# Altium PCB iCEstick_extension.PcbDoc
Units mm, origin at the board's own origin, x right, y up, seen from the top; angles counter-clockwise.
Board outline 37 x 15.2 mm, 2 copper layers (Top Layer, Bottom Layer), stack 1.071 mm thick; 16 components, 12 nets, 53 pads, 53 vias.
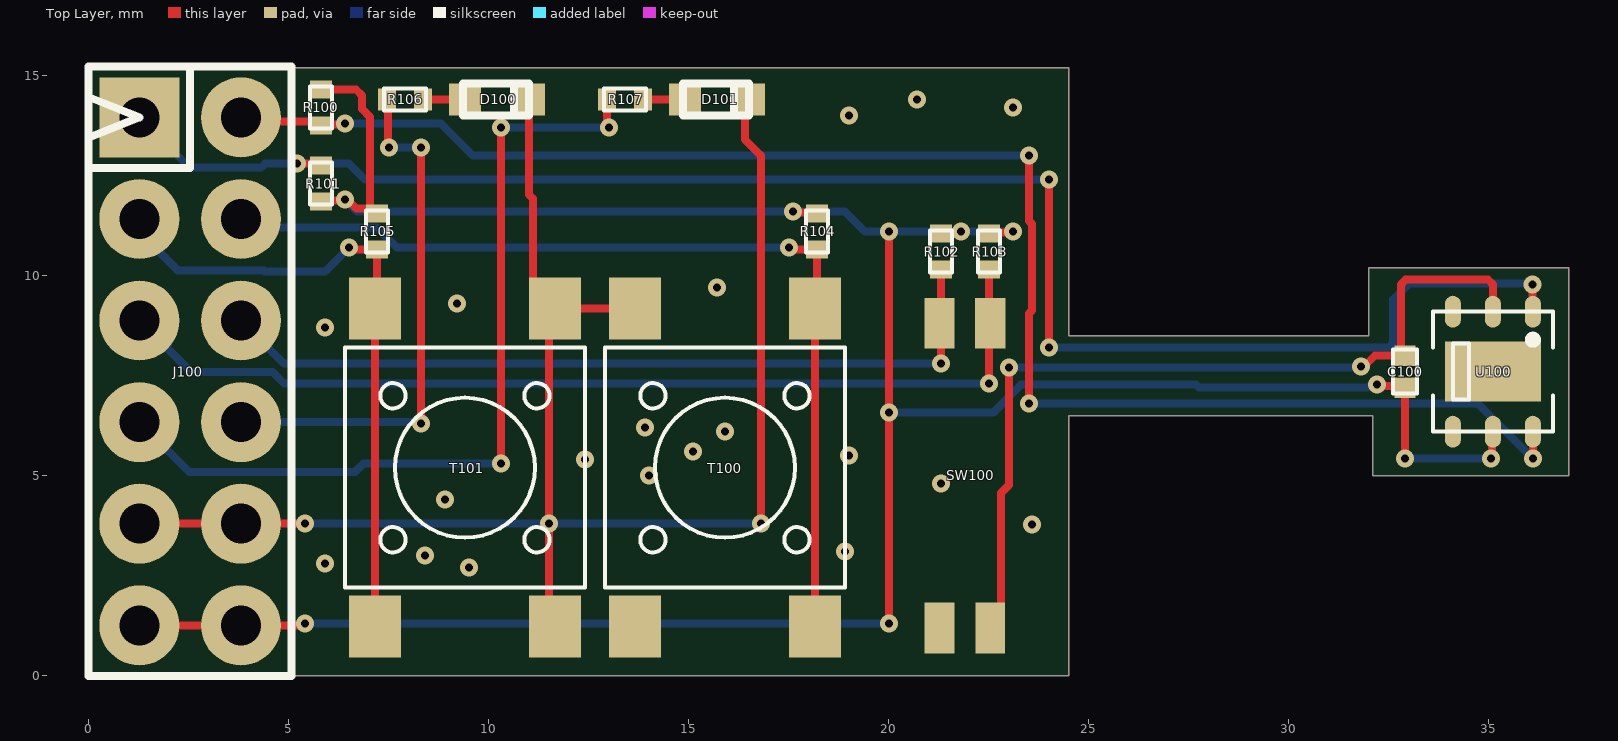
[diagram p0: Top Layer view]
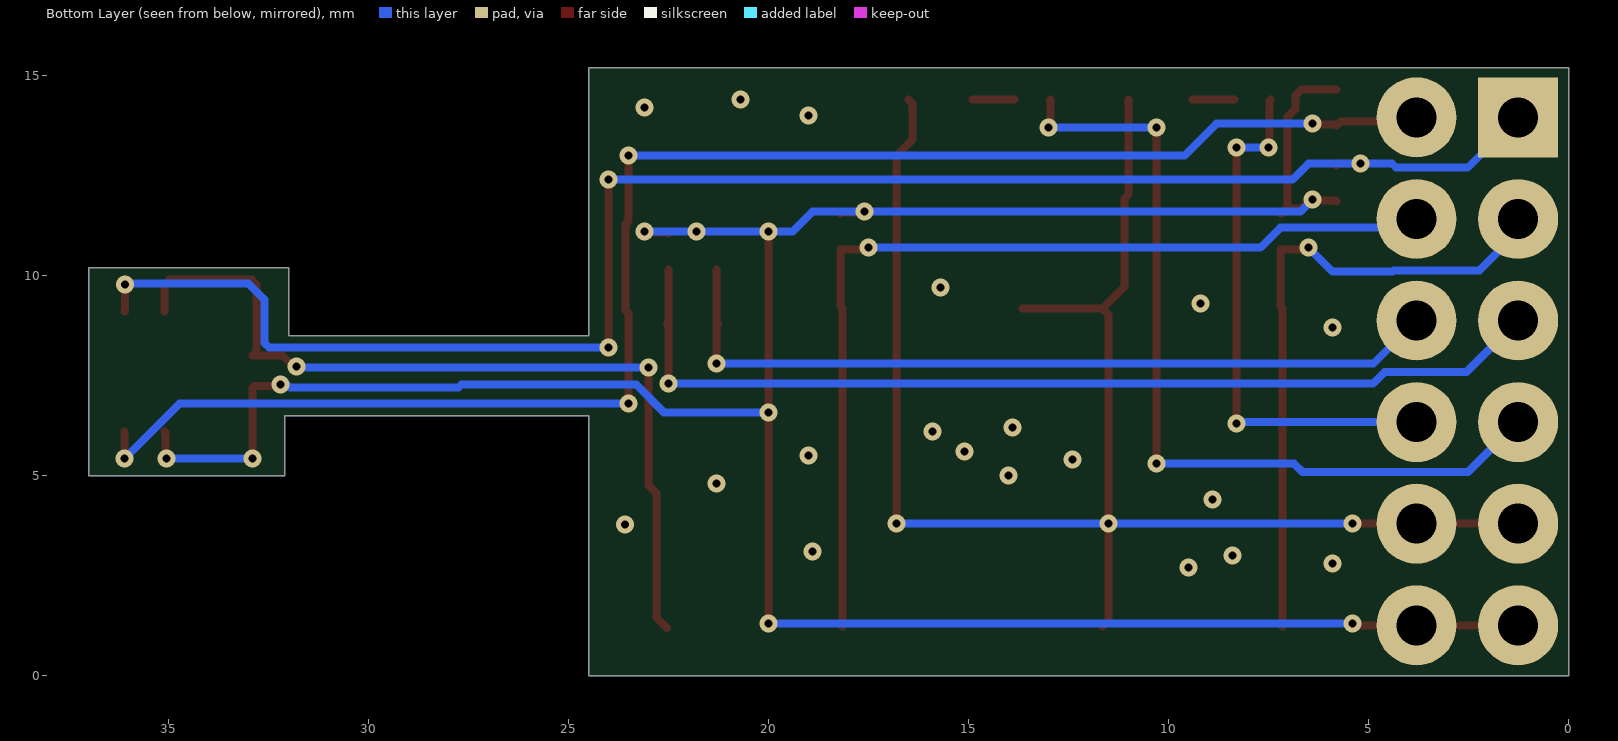
[diagram p1: Bottom Layer view, seen from below]

## Layer stack, top to bottom
Top Solder: solder mask 0.0102, Solder Resist, Dk 3.5
Top Layer: signal copper 0.0356
Dielectric1: core 1, FR-4, Dk 4.8
Bottom Layer: signal copper 0.0356
Bottom Solder: solder mask 0.0102, Solder Resist, Dk 3.5

## Board outline
0,0 0,15.2 24.5,15.2 24.5,8.5 32,8.5 32,10.2 37,10.2 37,5 32.1,5 32.1,6.5 24.5,6.5 24.5,0

## Design rules (kind name [scope] priority, off if disabled: settings)
AssemblyTestPointUsage [All] p0 off: scope1count=1 scope1_0_kind=Board scope1_0_value=Board scope2count=1 scope2_0_kind=Board scope2_0_value=Board commentlength=0
AssemblyTestPointUsage [All] p1 off:
AssemblyTestpoint [All] p0 off: scope1count=1 scope1_0_kind=Board scope1_0_value=Board scope2count=1 scope2_0_kind=Board scope2_0_value=Board commentlength=0
AssemblyTestpoint [All] p1 off: testpointundercomponent=TRUE minsize=1.016 maxsize=2.54 preferedsize=1.524 minholesize=0 maxholesize=1.016 preferedholesize=0.813 testpointgrid=0.025 usegrid=TRUE gridtolerance=0 allowsidetop=TRUE allowsidebottom=TRUE
BoardOutlineClearance [All] p0 off: scope1count=1 scope1_0_kind=Board scope1_0_value=Board scope2count=1 scope2_0_kind=Board scope2_0_value=Board commentlength=83 gap=0.2 // Protel DXP Scope 1 Expression Was: Not OnLayer('Top Overlay', 'Bottom Overlay')
BoardOutlineClearance [Not OnLayer('Top Overlay', 'Bottom Overlay')] p1: gap=0.2 ignorepadtopadclearanceinfootprint=FALSE
Clearance [All] p0: scope1count=1 scope1_0_kind=Board scope1_0_value=Board scope2count=1 scope2_0_kind=Board scope2_0_value=Board commentlength=0 gap=0.15
Clearance Clearance_Polygon [All] p0 off: scope1count=1 scope1_0_kind=Board scope1_0_value=Board scope2count=1 scope2_0_kind=Board scope2_0_value=Board commentlength=82 gap=0.254 // Protel DXP Scope 2 Expression Was: not (istrack and OnLayer('Keep-Out Layer'))
Clearance Clearance_Polygon [InNamedPolygon('Top-GND') vs not (istrack and OnLayer('Keep-Out Layer'))] p1: gap=0.254 ignorepadtopadclearanceinfootprint=FALSE except(0: Arc-Hole Track-Hole SMDPad-Hole THPad-Hole Via-Hole Fill-Hole Poly-Hole Region-Hole Text-Hole)
Clearance [All] p2: gap=0.15 ignorepadtopadclearanceinfootprint=FALSE except(0: Arc-Hole Track-Hole SMDPad-Hole THPad-Hole Via-Hole Fill-Hole Poly-Hole Region-Hole Text-Hole)
ComponentClearance [All] p0 off: scope1count=1 scope1_0_kind=Board scope1_0_value=Board scope2count=1 scope2_0_kind=Board scope2_0_value=Board commentlength=0 gap=0.254 collisioncheckmode=3
ComponentClearance [All] p1 off: gap=0.254 collisioncheckmode=3 verticalgap=0.254 showdistances=FALSE
DiffPairsRouting [All] p0: scope1count=1 scope1_0_kind=Board scope1_0_value=Board scope2count=1 scope2_0_kind=Board scope2_0_value=Board commentlength=0
FabricationTestPointUsage [All] p0 off: scope1count=1 scope1_0_kind=Board scope1_0_value=Board scope2count=1 scope2_0_kind=Board scope2_0_value=Board commentlength=0 valid=0 allowmultiple=FALSE
FabricationTestPointUsage [All] p1 off: valid=0 allowmultiple=FALSE
FabricationTestpoint [All] p0 off: scope1count=1 scope1_0_kind=Board scope1_0_value=Board scope2count=1 scope2_0_kind=Board scope2_0_value=Board commentlength=0 side=3 testpointundercomponent=TRUE minsize=1.016 maxsize=2.54 preferedsize=1.524 minholesize=0 maxholesize=1.016 preferedholesize=0.813 testpointgrid=0.025
FabricationTestpoint [All] p1 off: side=3 testpointundercomponent=TRUE minsize=1.016 maxsize=2.54 preferedsize=1.524 minholesize=0 maxholesize=1.016 preferedholesize=0.813 testpointgrid=0.025 allowsidetop=TRUE allowsidebottom=TRUE usegrid=TRUE gridtolerance=0
FanoutControl Fanout_BGA [All] p0 off: scope1count=1 scope1_0_kind=Board scope1_0_value=Board scope2count=1 scope2_0_kind=Board scope2_0_value=Board commentlength=69 // Protel DXP Scope 1 Expression Was: IsBGA   Fanout_BGA (Default Rule)
FanoutControl Fanout_LCC [All] p0 off: scope1count=1 scope1_0_kind=Board scope1_0_value=Board scope2count=1 scope2_0_kind=Board scope2_0_value=Board commentlength=69 // Protel DXP Scope 1 Expression Was: IsLCC   Fanout_LCC (Default Rule)
FanoutControl Fanout_SOIC [All] p0 off: scope1count=1 scope1_0_kind=Board scope1_0_value=Board scope2count=1 scope2_0_kind=Board scope2_0_value=Board commentlength=71 // Protel DXP Scope 1 Expression Was: IsSOIC   Fanout_SOIC (Default Rule)
FanoutControl Fanout_Small [All] p0 off: scope1count=1 scope1_0_kind=Board scope1_0_value=Board scope2count=1 scope2_0_kind=Board scope2_0_value=Board commentlength=84 // Protel DXP Scope 1 Expression Was: (CompPinCount < 5)   Fanout_Small (Default Rule)
FanoutControl Fanout_Default [All] p0: scope1count=1 scope1_0_kind=Board scope1_0_value=Board scope2count=1 scope2_0_kind=Board scope2_0_value=Board commentlength=30 // Fanout_Default (Default Rule)
Height [All] p0: scope1count=1 scope1_0_kind=Board scope1_0_value=Board scope2count=1 scope2_0_kind=Board scope2_0_value=Board commentlength=0
HoleSize [All] p0: scope1count=1 scope1_0_kind=Board scope1_0_value=Board scope2count=1 scope2_0_kind=Board scope2_0_value=Board commentlength=0 absolutevalues=TRUE maxlimit=5 minlimit=0.2 maxpercent=80.000 minpercent=20.000
HoleSize [All] p1: absolutevalues=TRUE maxlimit=5 minlimit=0.2 maxpercent=80.000 minpercent=20.000
HoleToHoleClearance HoleToHoleClearance_Seperator [All] p0: scope1count=1 scope1_0_kind=Board scope1_0_value=Board scope2count=1 scope2_0_kind=Board scope2_0_value=Board commentlength=0
HoleToHoleClearance [All] p0: scope1count=1 scope1_0_kind=Board scope1_0_value=Board scope2count=1 scope2_0_kind=Board scope2_0_value=Board commentlength=0
HoleToHoleClearance HoleToHoleClearance_Seperator [All] p1: gap=0.1 allowstackedmicrovias=TRUE
HoleToHoleClearance [All] p2: gap=0.2 allowstackedmicrovias=TRUE
LayerPairs [All] p0: scope1count=1 scope1_0_kind=Board scope1_0_value=Board scope2count=1 scope2_0_kind=Board scope2_0_value=Board commentlength=0 enforce=TRUE
MinimumSolderMaskSliver [All] p0 off: scope1count=1 scope1_0_kind=Board scope1_0_value=Board scope2count=1 scope2_0_kind=Board scope2_0_value=Board commentlength=0
MinimumSolderMaskSliver [All] p1 off: minsoldermaskwidth=0.1
NetAntennae [All] p0: scope1count=1 scope1_0_kind=Board scope1_0_value=Board scope2count=1 scope2_0_kind=Board scope2_0_value=Board commentlength=0
PasteMaskExpansion [All] p0: scope1count=1 scope1_0_kind=Board scope1_0_value=Board scope2count=1 scope2_0_kind=Board scope2_0_value=Board commentlength=0 expansion=0
PlaneClearance [All] p0: scope1count=1 scope1_0_kind=Board scope1_0_value=Board scope2count=1 scope2_0_kind=Board scope2_0_value=Board commentlength=0 clearance=0.508
PlaneConnect [All] p0: scope1count=1 scope1_0_kind=Board scope1_0_value=Board scope2count=1 scope2_0_kind=Board scope2_0_value=Board commentlength=0 planeconnectstyle=Relief reliefexpansion=0.508 reliefentries=4 reliefconductorwidth=0.254 reliefairgap=0.254
PolygonConnect [All] p0: scope1count=1 scope1_0_kind=Board scope1_0_value=Board scope2count=1 scope2_0_kind=Board scope2_0_value=Board commentlength=0 connectstyle=Relief reliefconductorwidth=0.254 reliefentries=4 polygonreliefangle="90 Angle"
PolygonConnect Polygon_Via [All] p0 off: scope1count=1 scope1_0_kind=Board scope1_0_value=Board scope2count=1 scope2_0_kind=Board scope2_0_value=Board commentlength=44 connectstyle=Direct reliefconductorwidth=0.254 reliefentries=4 polygonreliefangle="90 Angle" // Protel DXP Scope 1 Expression Was: isvia
PolygonConnect Polygon_Via [isvia] p1: connectstyle=Direct reliefconductorwidth=0.254 reliefentries=4 polygonreliefangle="90 Angle" airgapwidth=0.254
PolygonConnect [All] p2: connectstyle=Relief reliefconductorwidth=0.254 reliefentries=4 polygonreliefangle="90 Angle" airgapwidth=0.254
RoutingCorners [All] p0: scope1count=1 scope1_0_kind=Board scope1_0_value=Board scope2count=1 scope2_0_kind=Board scope2_0_value=Board commentlength=0 cornerstyle=45-Degree minsetback=2.54 maxsetback=2.54
RoutingLayers [All] p0: scope1count=1 scope1_0_kind=Board scope1_0_value=Board scope2count=1 scope2_0_kind=Board scope2_0_value=Board commentlength=0 top layer=Automatic bottom layer=Automatic
RoutingPriority [All] p0: scope1count=1 scope1_0_kind=Board scope1_0_value=Board scope2count=1 scope2_0_kind=Board scope2_0_value=Board commentlength=0
RoutingTopology [All] p0: scope1count=1 scope1_0_kind=Board scope1_0_value=Board scope2count=1 scope2_0_kind=Board scope2_0_value=Board commentlength=0 topology=Shortest
RoutingVias [All] p0: scope1count=1 scope1_0_kind=Board scope1_0_value=Board scope2count=1 scope2_0_kind=Board scope2_0_value=Board commentlength=0 holewidth=0.2 width=0.45 viastyle="Through Hole" minholewidth=0.2 minwidth=0.45 maxholewidth=0.2 maxwidth=0.45
RoutingVias [All] p1: holewidth=0.2 width=0.45 viastyle="Through Hole" minholewidth=0.2 minwidth=0.45 maxholewidth=0.2 maxwidth=0.45
ShortCircuit [All] p0: scope1count=1 scope1_0_kind=Board scope1_0_value=Board scope2count=1 scope2_0_kind=Board scope2_0_value=Board commentlength=0 allowed=FALSE
SilkToBoardRegionClearance [All] p0: scope1count=1 scope1_0_kind=Board scope1_0_value=Board scope2count=1 scope2_0_kind=Board scope2_0_value=Board commentlength=0
SilkToSilkClearance [All] p0 off: scope1count=1 scope1_0_kind=Board scope1_0_value=Board scope2count=1 scope2_0_kind=Board scope2_0_value=Board commentlength=0
SilkToSilkClearance [All] p1 off: silktosilkclearance=0.254
SilkToSolderMaskClearance SilkscreenOverComponentPads [All] p0 off: scope1count=1 scope1_0_kind=Board scope1_0_value=Board scope2count=1 scope2_0_kind=Board scope2_0_value=Board commentlength=44 // Protel DXP Scope 1 Expression Was: IsPad
SilkToSolderMaskClearance SilkscreenOverComponentPads [IsPad] p1 off: minsilkscreentomaskgap=0.254 clearancetoexposedcopper=TRUE
SolderMaskExpansion [All] p0: scope1count=1 scope1_0_kind=Board scope1_0_value=Board scope2count=1 scope2_0_kind=Board scope2_0_value=Board commentlength=0 expansion=0.1
SolderMaskExpansion [All] p1: expansion=0.1 istentingtop=FALSE
UnRoutedNet [All] p0: scope1count=1 scope1_0_kind=Board scope1_0_value=Board scope2count=1 scope2_0_kind=Board scope2_0_value=Board commentlength=0
UnpouredPolygon [All] p0: scope1count=1 scope1_0_kind=Board scope1_0_value=Board scope2count=1 scope2_0_kind=Board scope2_0_value=Board commentlength=0
Width [All] p0: scope1count=1 scope1_0_kind=Board scope1_0_value=Board scope2count=1 scope2_0_kind=Board scope2_0_value=Board commentlength=0 maxlimit=5 minlimit=0.15 preferedwidth=0.2
Width [All] p1: maxlimit=5 minlimit=0.15 preferedwidth=0.2
20 further rules are at their usual default settings.

## Components (designator, comment, footprint, x,y, rotation, side; value= is the part's Value field where it differs from the comment)
C100 "" CAPC0402(1005)60_L 32.9,7.6 r90 top
D100 "150060VS75000" "0603 LED pcb" 10.2,14.4 r180 top
D101 "150060VS75000" "0603 LED pcb" 15.7,14.4 r180 top
J100 "HDR2x6" HDR2x6 2.53,11.42 r270 top
R100 "RMCF0402FT4K70" RESC0402(1005)_L 5.8,14.2 r270 top
R101 "RMCF0402FT4K70" RESC0402(1005)_L 5.8,12.3 r90 top
R102 "RMCF0402FT4K70" RESC0402(1005)_L 21.3,10.6 r270 top
R103 "RMCF0402FT4K70" RESC0402(1005)_L 22.5,10.6 r270 top
R104 "RMCF0402FT4K70" RESC0402(1005)_L 18.2,11.1 r270 top
R105 "RMCF0402FT4K70" RESC0402(1005)_L 7.2,11.1 r270 top
R106 "RC0402FR-07100RL" RESC0402(1005)_L 7.9,14.4 r0 top
R107 "RC0402FR-07100RL" RESC0402(1005)_L 13.4,14.4 r0 top
SW100 "SW DIP-2" SW_TDA02 21.9,5 r270 top
T100 "PTS645SK43SMTR92LFS" "PTS645SM43SMTR92 LFS - duplicate" 15.9,5.2 r270 top
T101 "PTS645SK43SMTR92LFS" "PTS645SM43SMTR92 LFS - duplicate" 9.4,5.2 r90 top
U100 "SHT21" SHT2x_DFN6 35.1,7.6 r270 top

## Footprints (in the part's own frame and the unit in brackets; to place one, negate y for a bottom-side part, rotate by r counter-clockwise, add the part's x,y. Pads: shape width x height; smd on the part's side, far side on the other; paste and mask are expansions set on the pad)
"0603 LED pcb" [mm] "0603 SMD LED Height max. 1mm"
  rect 0.8x0.8 smd: 1(-0.8,0) 2(0.8,0)
  silkscreen extent -0.8,-0.4 0.85,0.4
CAPC0402(1005)60_L [mm] "Chip Capacitor, Body 1.0x0.5mm, Height 0.6mm, IPC High Density"
  rect 0.52x0.52 smd: 1(-0.4,0) 2(0.4,0)
  silkscreen extent -0.55,-0.3 0.55,0.3
HDR2x6 [mm] "2x6 Pin Header, 2.54 mm"
  rect 2x2 hole 1: 1(-2.54,-1.27)
  round 2 hole 1: 2(-2.54,1.27) 3(0,-1.27) 4(0,1.27) 5(2.54,-1.27) 6(2.54,1.27) 7(5.08,-1.27) 8(5.08,1.27) 9(7.62,-1.27) 10(7.62,1.27) 11(10.16,-1.27) 12(10.16,1.27)
  silkscreen extent -3.81,-2.54 11.43,2.54
"PTS645SM43SMTR92 LFS - duplicate" [mm] "SWITCH TACTILE SPST-NO 0.05A 12V"
  rect 1.55x1.3 smd: 1(-3.975,2.25) 2(3.975,2.25) 3(-3.975,-2.25) 4(3.975,-2.25)
  silkscreen extent -3,-3 3,3
RESC0402(1005)_L [mm] "Chip Resistor, Body 1.0x0.5mm, IPC High Density"
  rect 0.45x0.55 smd: 1(-0.45,0) 2(0.45,0)
  silkscreen extent -0.53,-0.27 0.53,0.28
SHT2x_DFN6 [mm]
  oval 0.8x0.4 smd: 1(-1.5,1) 2(-1.5,0) 3(-1.5,-1) 4(1.5,-1) 5(1.5,0) 6(1.5,1)
  rect 1.5x2.4 smd: 7(0,0)
  silkscreen extent -1.5,-1.5 1.5,1.5
SW_TDA02 [mm]
  rect 1.27x0.76 smd: 1(-3.81,0.635) 2(-3.81,-0.635) 3(3.81,-0.635)
  rect 1.27x0.74 smd: 4(3.81,0.635)

## Part data
C100: library part CMP-00636-01, "0.1µF ±10% 100V Ceramic Capacitor X5R 0402 (1005 Metric)"
D100 D101: library part CMP-00024-A.5, "Green 570nm LED Indication - Discrete 2V 0603 (1608 Metric)"
J100: library part HDR2x6-02, "2x6 Pin Header, 2.54mm"
R100 R101 R102 R103 R104 R105: library part CMP-00490-01, "4.7 kOhms ±1% 0.063W, 1/16W Chip Resistor 0402 (1005 Metric) Automotive AEC-Q200 Thick Film"
R106 R107: library part CMP-00556-01, "100 Ohms ±1% 0.063W, 1/16W Chip Resistor 0402 (1005 Metric)  Thick Film"
SW100: library part CMP-001-0045-01, "SWITCH DIP 2POS HALF PITCH 24V"
T100 T101: library part CMP-00280-01, "SWITCH TACTILE SPST-NO 0.05A 12V"
U100: library part SHT21-01, "Hygrometer and Thermometer, I2C Bus"

## Via types
v1: diameter 0.45, hole 0.2, Top Layer to Bottom Layer, tented both sides, 53 vias

## Nets (pads, with @x,y where several pads share a name; then routed paths per layer and width w, separated by ;. In a path a pad name is that pad's centre, name@x,y a point inside that pad or via, vN(x,y) a via of type N, cw(c..) or ccw(c..) an arc to the next point about the centre after c; other vN are vias at no path point)
3V3: C100.1 J100.11 J100.12 R100.1 R101.1 R102.1 R103.1 R104.1 R105.1 U100.5 | length 70.5
  Top Layer w0.2: J100.11 J100.12 5.36,1.26 v1(5.4,1.3) ; R101.1 5.825,11.875 6.375,11.875 v1(6.4,11.9) 6.468,11.9 6.693,11.675 R105.1@7.025,11.675 ; R100.1 6.683,14.65 6.824,14.509 6.824,14.172 7.025,13.971 R105.1@7.025,11.675 ; v1(17.6,11.6) 17.625,11.575 18.175,11.575 R104.1 ; v1(20,1.3) 20,6.582 v1(20,11.1) ; R103.1 22.525,11.075 23.075,11.075 v1(23.1,11.1) ; v1(32.2,7.275) 32.237,7.237 32.863,7.237 32.903,7.197 32.903,5.428 v1(32.906,5.425) ; v1(35.05,5.425) 35.075,5.45 35.075,6.075 U100.5 ; R105.1@7.025,11.675 7.075,11.675 R105.1 7.15,11.55 R105.1@7.025,11.675
  Bottom Layer w0.2: v1(5.4,1.3) v1(20,1.3) ; v1(6.4,11.9) 6.7,11.6 v1(17.6,11.6) 18.9,11.6 19.4,11.1 v1(20,11.1) v1(21.8,11.1) v1(23.1,11.1) ; v1(20,6.582) 22.611,6.582 23.303,7.275 27.68,7.275 27.755,7.2 31.958,7.2 31.985,7.227 32.152,7.227 v1(32.2,7.275) ; v1(32.906,5.425) v1(35.05,5.425)
GND: C100.2 D100.1 D101.1 J100.9 J100.10 SW100.3 SW100.4 T100.3 T100.4 T101.3 T101.4 U100.2 | length 63.5
  Top Layer w0.2: J100.9 J100.10 v1(5.4,3.8) ; D100.1 11,12.025 11.1,11.925 11.1,9.725 T101.4 ; T101.3 11.5,1.375 v1(11.5,3.8) 11.5,9.025 T101.4 ; T100.3 T101.4 ; D101.1 16.4,14.3 16.4,13.4 16.8,13 v1(16.8,3.8) ; SW100.4 22.805,1.46 22.805,4.57 23,4.765 v1(23,7.7) ; v1(31.803,7.725) 31.871,7.725 32.146,8 C100.2 32.8,8.1 32.8,9.783 32.917,9.9 34.983,9.9 35.1,9.783 U100.2
  Bottom Layer w0.2: v1(5.4,3.8) v1(11.5,3.8) v1(16.8,3.8) ; v1(23,7.7) 31.778,7.7 v1(31.803,7.725)
  other v1: 9.5,2.7 5.9,2.8 8.4,3 18.9,3.1 23.582,3.782 8.9,4.4 21.3,4.8 14,5 12.4,5.4 19,5.5 15.1,5.6 15.9,6.1 13.9,6.2 5.9,8.7 9.2,9.3 15.7,9.7 19,14 23.1,14.2 20.7,14.4
NetD100_2: D100.2 R106.2 | length 1
  Top Layer w0.2: R106.2 D100.2
NetD101_2: D101.2 R107.2 | length 1
  Top Layer w0.2: R107.2 D101.2
PIO1_02: J100.1 R101.2 U100.1 | length 42.4
  Top Layer w0.2: v1(5.2,12.8) 5.75,12.8 R101.2 ; v1(24,8.2) v1(24,12.4) ; v1(36.088,9.775) 36.094,9.769 36.094,9.106 U100.1
  Bottom Layer w0.2: J100.1 2.52,12.7 4.308,12.7 4.408,12.8 v1(5.2,12.8) 6.5,12.8 6.9,12.4 v1(24,12.4) ; v1(24,8.2) 32.483,8.2 32.6,8.317 32.6,9.4 33,9.8 36.063,9.8 v1(36.088,9.775)
PIO1_03: J100.3 R105.2 T101.1 T101.2 | length 16.4
  Top Layer w0.2: v1(6.5,10.7) 6.55,10.65 R105.2 7.2,9.225 T101.2 T101.1
  Bottom Layer w0.2: J100.3 1.26,11.1 2.23,10.13 4.376,10.13 4.406,10.1 5.9,10.1 v1(6.5,10.7)
PIO1_04: J100.5 R103.2 SW100.1 | length 24.8
  Top Layer w0.2: v1(22.5,7.3) 22.5,8.775 SW100.1 22.5,8.845 R103.2
  Bottom Layer w0.2: J100.5 2.55,7.59 4.595,7.59 4.885,7.3 v1(22.5,7.3)
PIO1_05: J100.7 R107.1 | length 21.5
  Top Layer w0.2: v1(10.3,5.3) v1(10.3,13.7) ; R107.1 12.95,13.75 v1(13,13.7)
  Bottom Layer w0.2: J100.7 2.51,5.09 6.652,5.09 6.862,5.3 v1(10.3,5.3) ; v1(10.3,13.7) v1(13,13.7)
PIO1_07: J100.2 R100.2 U100.6 | length 40.2
  Top Layer w0.2: J100.2 3.905,13.855 5.695,13.855 R100.2 5.825,13.775 6.375,13.775 v1(6.4,13.8) ; v1(23.5,6.8) 23.5,9.056 23.575,9.131 23.575,11.297 23.5,11.372 v1(23.5,13) ; v1(36.1,5.425) U100.6
  Bottom Layer w0.2: v1(6.4,13.8) 8.8,13.8 9.6,13 v1(23.5,13) ; v1(23.5,6.8) 32.003,6.8 34.725,6.8 v1(36.1,5.425)
PIO1_08: J100.4 R104.2 T100.1 T100.2 | length 24.2
  Top Layer w0.2: v1(17.5,10.7) 17.55,10.65 R104.2 18.2,9.225 T100.1 T100.2
  Bottom Layer w0.2: J100.4 4.02,11.2 7.2,11.2 7.7,10.7 v1(17.5,10.7)
PIO1_09: J100.6 R102.2 SW100.2 | length 20.3
  Top Layer w0.2: v1(21.3,7.8) 21.3,8.775 SW100.2 21.3,8.845 R102.2
  Bottom Layer w0.2: J100.6 4.88,7.8 v1(21.3,7.8)
PIO1_10: J100.8 R106.1 | length 13.4
  Top Layer w0.2: R106.1 7.475,14.375 7.475,13.225 v1(7.5,13.2) ; v1(8.3,6.3) v1(8.3,13.2)
  Bottom Layer w0.2: J100.8 8.26,6.34 v1(8.3,6.3) ; v1(7.5,13.2) v1(8.3,13.2)
pads on no net: U100.3 U100.4 U100.7

## Polygon pours and split planes (outlines as drawn)
GND on Top Layer "Top Layer-GND" (solid, pour order 0): 0,0 0,15.2 24.5,15.2 24.5,8.5 32,8.5 32,10.2 37,10.2 37,5 32.1,5 32.1,6.5 24.5,6.5 24.5,0
GND on Bottom Layer "BOTOM_GND" (solid, pour order 1): 0,0 0,15.2 24.5,15.2 24.5,8.5 32,8.5 32,10.2 37,10.2 37,5 32.1,5 32.1,6.5 24.5,6.5 24.5,0

## Silkscreen, mask and mechanical layers (free items; w line width, h text height)
BoardOutline:
  lines w0.254: 0,0 24.5,0 24.5,5 24.5,6.5 32.1,6.5 32.1,5 37,5 37,10.2 32,10.2 32,8.5 24.5,8.5 24.5,10.2 24.5,15.2 0,15.2 0,0

## Text inside footprints (layer, text, board x,y; h text height)
SW100: Silkscreen "ON" at 22.525,3.075 h0.5 r180; Silkscreen "2" at 21.55,7.725 h0.5 r180; Silkscreen "1" at 22.9,7.725 h0.5 r180; TopDimensions "GRM155R62A104KE14D" at 32.735,4.489 h1.52